# Altium PCB Sensor.PcbDoc
Units mm, origin at the board's own origin, x right, y up, seen from the top; angles counter-clockwise.
Board outline 152.4 x 101.6 mm, 2 copper layers (Top Layer, Bottom Layer); 5 components, 3 nets, 8 pads, 1 vias.
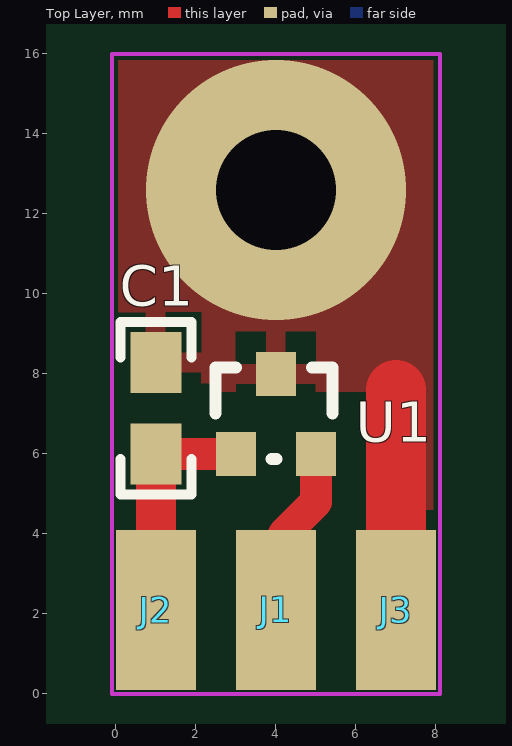
[diagram p0: Top Layer view]
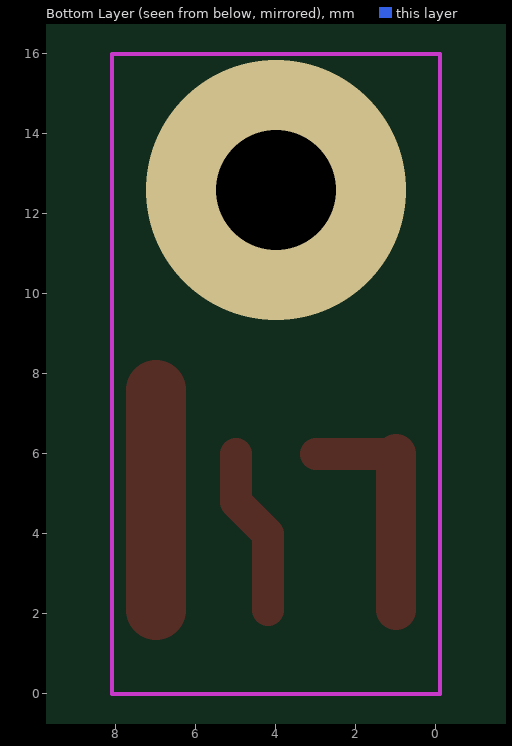
[diagram p1: Bottom Layer view, seen from below]

## Layer stack, top to bottom
Top Layer: signal copper 0.0356
Dielectric: dielectric 0.32, FR-4, Dk 4.8
Bottom Layer: signal copper 0.0356

## Board outline
-75.6,-62.6 76.8,-62.6 76.8,39 -75.6,39

## Design rules (kind name [scope] priority, off if disabled: settings)
Clearance KEEP [All vs OnLayer('Keep-Out Layer')] p1: gap=0.1
Clearance GND [InNet('GND') vs InNet('GND')] p2: gap=0.5
Clearance [All] p3: gap=1
ComponentClearance [All] p1: gap=0.254 collisioncheckmode=3 verticalgap=0.254
PolygonConnect [All] p1: connectstyle=Relief reliefconductorwidth=0.5 reliefentries=4 polygonreliefangle="90 Angle"
RoutingVias [All] p1: holewidth=0.711 width=1.27 viastyle="Through Hole" minholewidth=0.711 minwidth=1.27 maxholewidth=0.711 maxwidth=1.27
SolderMaskExpansion [All] p1: expansion=0.102
TestPointUsage [All] p1: valid=0 allowmultiple=FALSE
Testpoint [All] p1: side=15 testpointundercomponent=TRUE minsize=1.016 maxsize=2.54 preferedsize=1.524 minholesize=0 maxholesize=1.016 preferedholesize=0.813 testpointgrid=0.025 style=1023 order=0-112345678
Width [All] p1: maxlimit=2 minlimit=0.254 preferedwidth=1.2 toplayer_prefwidth=0.8 minimp=50.000000 maximp=50.000000 favimp=50.000000
17 further rules are at their usual default settings.

## Components (designator, comment, footprint, x,y, rotation, side; value= is the part's Value field where it differs from the comment)
C1 "100nF" 0805 1,6 r90 top locked
J1 "CON3" CON2 4,2.1 r0 top
J2 "CON3" CON2 1,2.1 r0 top
J3 "CON3" CON2 7,2.1 r0 top
U1 "TC1047A" SOT-23 3,6 r0 top locked

## Footprints (in the part's own frame and the unit in brackets; to place one, negate y for a bottom-side part, rotate by r counter-clockwise, add the part's x,y. Pads: shape width x height; smd on the part's side, far side on the other; paste and mask are expansions set on the pad)
0805 [mil]
  rect 60x50 smd: 1(0,0) 2(90,0)
  silkscreen extent -40,-35 130,35
CON2 [mm] "Pad de medicion 0.85 x 1.4mm"
  rect 2x4 smd: 1(0,0)
SOT-23 [mm]
  rect 1x1.1 smd: 1(0,0) 2(2,0) 3(1,2)
  silkscreen extent -0.51,-0.13 2.41,2.16

## Part data
C1: library part 100n, "CAPACITOR SMD 0805 X7R  50 V 100 nF"
J1 J2 J3: "PAD 2X2"
U1: "TC1047A SENSOR DE TEMPERATURA"

## Via types
v1: diameter 6.5, hole 3, Top Layer to Bottom Layer, 1 vias

## Nets (pads, with @x,y where several pads share a name; then routed paths per layer and width w, separated by ;. In a path a pad name is that pad's centre, name@x,y a point inside that pad or via, vN(x,y) a via of type N, cw(c..) or ccw(c..) an arc to the next point about the centre after c; other vN are vias at no path point)
GND: C1.2 J3.1 U1.3 | length 5.5
  Top Layer w1.5: J3.1 7,7.6
  other v1: 4,12.6
NetC1_1: C1.1 J2.1 U1.1 | length 5.9
  Top Layer w0.8: C1.1 U1.1
  Top Layer w1: J2.1 C1.1
NetJ1_1: J1.1 U1.2 | length 4.2
  Top Layer w0.8: J1.1@4.2,2.1 4.2,4 5,4.8 U1.2

## Polygon pours and split planes (outlines as drawn)
GND on Top Layer (solid, remove dead copper): -0.1,15.9 8.5,15.9 8.5,0 -0.1,0

## Keep-outs
Keep-Out Layer:
  lines w0.1: -0.1,0 8.1,0 8.1,16 -0.1,16 -0.1,0